# Altium PCB LAN9512_pcb.PcbDoc (part 2 of 2)
Units mm, origin at the board's own origin, x right, y up, seen from the top; angles counter-clockwise.
Board outline 57.95 x 40.02 mm, 2 copper layers (Top Layer, Bottom Layer), stack 1.671 mm thick; 67 components, 38 nets, 238 pads, 97 vias.
Unrouted connection lines stored in the file: 1.
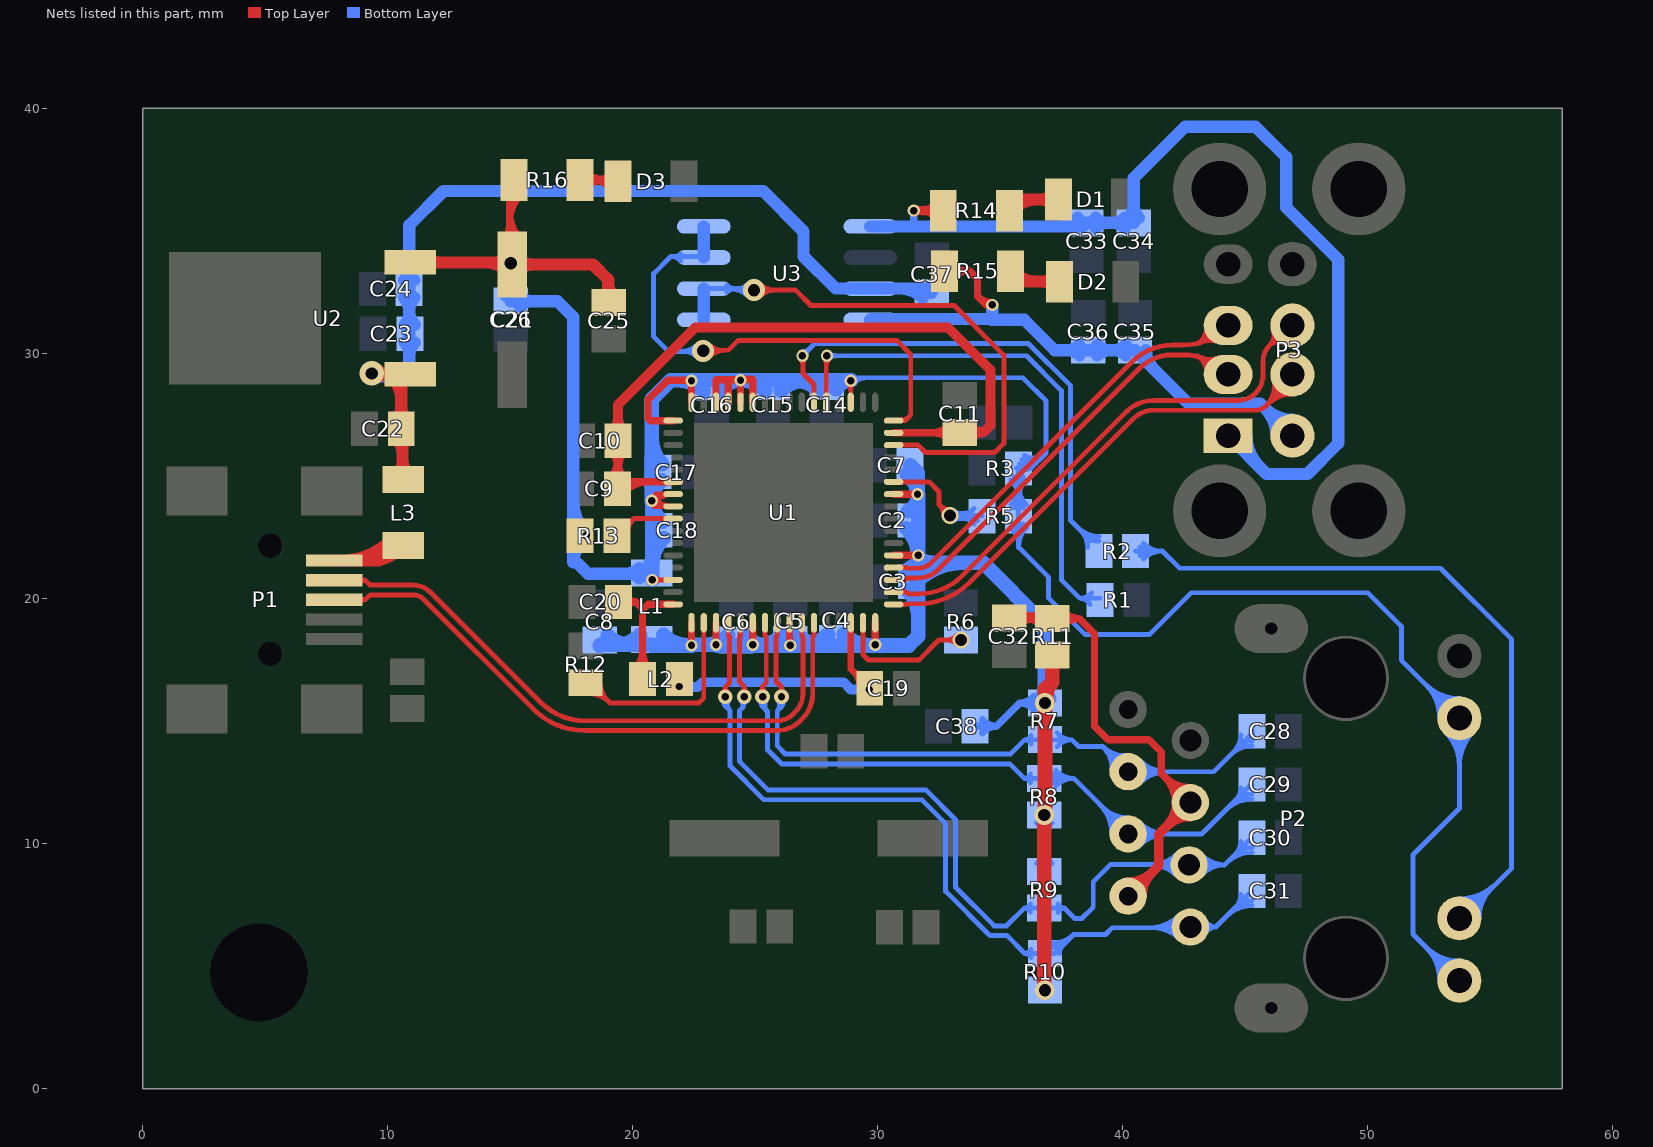
[diagram p2: the nets of this part, all layers, seen from the top]

## Via types
v1: diameter 0.6, hole 0.4, Top Layer to Bottom Layer, 49 vias
v2: diameter 0.5, hole 0.3, Top Layer to Bottom Layer, 16 vias
v3: diameter 1, hole 0.5, Top Layer to Bottom Layer, 12 vias
v4: diameter 0.6, hole 0.3, Top Layer to Bottom Layer, 5 vias
v5: diameter 0.9, hole 0.5, Top Layer to Bottom Layer, 4 vias
v6: diameter 0.8, hole 0.5, Top Layer to Bottom Layer, 3 vias
v7: diameter 0.7, hole 0.5, Top Layer to Bottom Layer, 3 vias
v8: diameter 1.27, hole 0.711, Top Layer to Bottom Layer, 2 vias
v9: diameter 0.7, hole 0.3, Top Layer to Bottom Layer, 2 vias
v10: diameter 0.8, hole 0.3, Top Layer to Bottom Layer, 1 vias

## Nets (pads, with @x,y where several pads share a name; then routed paths per layer and width w, separated by ;. In a path a pad name is that pad's centre, name@x,y a point inside that pad or via, vN(x,y) a via of type N, cw(c..) or ccw(c..) an arc to the next point about the centre after c; other vN are vias at no path point) (continued)
NetC32_2: C32.2 P2.2 P2.5 R11.1 | length 31
  Top Layer w0.3: C32.2@35.375,19.225 37.1,19.225 R11.1@37.125,19.2 38.225,19.2 ; C32.2@35.808,18.942 cw(c36.491,18.259) 36.491,19.225 cw(c36.491,20.191) C32.2@35.808,19.508 ; C32.2@35.949,19.225 cw(c35.949,18.174) R11.1@36.692,18.917 ; C32.2@36.07,19.225 ccw(c36.07,20.105) R11.1@36.692,19.483 ; 36.177,19.309 ccw(c36.303,19.78) R11.1@36.672,19.461 ; 36.252,19.289 cw(c36.092,18.69) R11.1@36.629,19 ; 36.258,19.163 cw(c36.342,18.85) R11.1@36.625,19.007 ; 36.352,19.188 ccw(c36.234,19.628) R11.1@36.629,19.4 ; R11.1@37.561,18.92 cw(c38.225,18.272) 38.225,19.2 ; R11.1@37.561,19.48 ccw(c38.225,20.128) 38.225,19.2 ; P2.5@42.152,11.683 ccw(c40.674,11.683) 41.719,12.728 ccw(c42.764,13.772) P2.5@42.764,12.295 ; P2.5@42.764,11.683 41.575,12.872 41.575,13.75 41.075,14.25 39.4,14.25 38.85,14.8 38.85,18.575 38.225,19.2
  Top Layer w0.4: P2.2@40.224,7.863 41.475,9.114 41.475,10.394 P2.5@42.764,11.683 ; P2.2@40.224,8.425 ccw(c40.224,9.782) 41.183,8.822 ccw(c42.143,7.863) P2.2@40.786,7.863 ; P2.5@42.202,11.683 cw(c40.845,11.683) 41.805,10.724 cw(c42.764,9.764) P2.5@42.764,11.121
NetD1_1: D1.1 R14.1 | length 4.3
  Top Layer w0.5: R14.1@35.375,35.85 35.825,36.3 D1.1@37.375,36.3 ; R14.1@35.587,35.938 cw(c36.461,35.064) 36.461,36.3 ; D1.1@37.163,36.088 ccw(c36.651,35.576) 36.651,36.3 ccw(c36.651,37.024) D1.1@37.163,36.512
NetD2_1: D2.1 R15.1 | length 4.7
  Top Layer w0.5: R15.1@35.425,33.625 R15.1@35.425,33.375 35.425,33 35.475,32.95 D2.1@37.425,32.95 ; R15.1@35.637,33.287 ccw(c36.451,34.101) 36.451,32.95 ; D2.1@37.213,32.738 ccw(c36.701,32.226) 36.701,32.95 ccw(c36.701,33.674) D2.1@37.213,33.162
NetD3_1: D3.1 R16.1 | length 5.1
  Top Layer w0.3: R16.1@17.725,37.125 D3.1@19.35,37.125 ; R16.1@18.133,36.817 cw(c18.876,36.074) D3.1@18.876,37.125 ; R16.1@18.133,37.383 ccw(c18.755,38.005) 18.755,37.125 ; R16.1@18.253,37.125 cw(c18.253,35.903) D3.1@19.117,36.767 ; 18.615,37.125 ccw(c18.615,37.835) D3.1@19.117,37.333 ; 18.699,37.077 cw(c18.769,36.813) D3.1@19.026,36.909
NetL3_2: L3.2 P1.1 | length 7.4
  Top Layer w0.5: P1.1@7.812,21.562 9.637,21.562 L3.2@10.3,22.225 ; P1.1@8.121,21.562 ccw(c8.121,24.379) L3.2@10.113,22.387 ; 9.328,21.562 ccw(c9.328,23.172) L3.2@10.466,22.034 ; 9.685,21.61 cw(c10.325,20.97) L3.2@10.325,21.875 ; L3.2@9.866,21.791 ccw(c9.482,22.175) L3.2@10.025,22.175
NetR1_2: R1.2 U1.21 | length 23.9
  Top Layer w0.2: v2@27.819,29.819 cw(c27.623,29.623) 27.9,29.623 ; U1.21@27.9,28.025 27.9,28.95 v2@27.9,29.975 ; 27.9,29.503 cw(c28.347,29.503) v2@28.031,29.819
  Bottom Layer w0.2: v2(27.925,29.925) 36.075,29.925 37.5,28.5 37.5,20.775 38.25,20.025 ; v2@28.031,29.819 cw(c28.287,29.563) 28.287,29.925 cw(c28.287,30.287) v2@28.031,30.031 ; R1.2@38.667,19.759 ccw(c38.25,19.564) 38.25,20.025 ; R1.2@38.736,20.246 cw(c38.25,20.67) 38.25,20.025 ; R1.2@39.075,20.025 38.25,20.025
NetR2_2: R2.2 U1.22 | length 24
  Top Layer w0.2: v2@26.819,29.819 cw(c26.503,29.503) 26.95,29.503 ; v2@26.912,29.913 26.95,29.875 26.95,29.2 27.4,28.75 U1.22@27.4,28.025 ; 26.95,29.623 cw(c27.227,29.623) v2@27.031,29.819
  Bottom Layer w0.2: v2(26.925,29.925) 27.425,30.425 36.15,30.425 37.875,28.7 37.875,23.2 R2.2@38.7,22.375 ; v2@26.925,30.075 ccw(c26.925,30.437) 27.181,30.181 ccw(c27.437,29.925) v2@27.075,29.925 ; 38.171,22.904 ccw(c39.025,23.757) R2.2@39.025,22.55 ; 38.292,22.783 cw(c37.609,22.1) R2.2@38.575,22.1 ; R2.2@38.513,22.562 ccw(c39.025,23.074) R2.2@39.025,22.35
NetR5_2: R5.2 U1.11 | length 10.2
  Top Layer w0.2: U1.11@30.65,24.775 32.1,24.775 32.5,24.375 32.5,23.85 32.725,23.625 v7@32.825,23.625 ; v7@32.7,23.4 ccw(c32.096,23.4) 32.523,23.827 ccw(c32.95,24.254) v7@32.95,23.65
  Bottom Layer w0.2: v7(32.95,23.4) 34.225,23.4 R5.2@34.25,23.375 ; v7@33.078,23.185 cw(c33.44,22.578) 33.623,23.261 ; v7@33.1,23.6 ccw(c33.453,24.071) 33.606,23.502 ; v7@33.103,23.4 cw(c33.103,22.228) R5.2@33.932,23.057 ; v7@33.127,23.223 cw(c33.554,22.796) 33.554,23.4 cw(c33.554,24.004) v7@33.127,23.577 ; v7@33.167,23.275 cw(c33.48,23.094) 33.386,23.443 ; v7@33.167,23.525 ccw(c33.572,23.759) 33.451,23.307 ; v7@33.224,23.4 ccw(c33.224,24.401) R5.2@33.932,23.693 ; 33.586,23.4 cw(c33.586,22.711) R5.2@34.073,23.198
NetR6_2: R6.2 U1.63 | length 6.7
  Top Layer w0.2: U1.63@29.4,19.025 29.4,17.725 29.625,17.5 31.675,17.5 32.5,18.325 v7(33.4,18.325) ; v7@33.223,18.148 ccw(c32.796,17.721) 32.796,18.325 ccw(c32.796,18.929) v7@33.223,18.502
NetR12_2: R12.2 U1.50 | length 11
  Top Layer w0.2: R12.2@18.075,16.575 18.25,16.575 19.075,15.75 22.7,15.75 22.9,15.95 U1.50@22.9,19.025 ; R12.2@18.225,16.125 cw(c18.225,14.978) 19.036,15.789 ; R12.2@18.225,16.325 cw(c18.225,15.661) R12.2@18.694,16.131 ; R12.2@18.475,16.575 ccw(c19.018,16.575) R12.2@18.634,16.191 ; R12.2@18.675,16.575 ccw(c19.701,16.575) 18.976,15.849
NetR13_2: R13.2 U1.41 | length 4.2
  Top Layer w0.2: R13.2@19.35,22.575 20.05,23.275 ; R13.2@19.433,22.961 ccw(c19.558,23.317) R13.2@19.825,23.05 ; R13.2@19.499,23.15 ccw(c19.675,23.65) 20.05,23.275 ; R13.2@19.8,22.725 cw(c20.524,22.725) 20.012,23.237 ; U1.41@21.65,23.275 20.05,23.275
PORTA: U1.14 U3.1 U3.2 | length 27
  Top Layer w0.2: v5(24.95,32.6) 26.65,32.6 27.275,31.975 33.125,31.975 35.15,29.95 35.15,26.35 34.775,25.975 31.95,25.975 31.65,26.275 U1.14@30.65,26.275 ; v5@25.197,32.353 cw(c25.795,31.755) 25.795,32.6 cw(c25.795,33.445) v5@25.197,32.847
  Bottom Layer w0.2: U3.2@22.9,32.625 U3.2@22.975,32.625 ; U3.2@22.9,32.665 v5@25.025,32.665 ; U3.2@23.841,32.524 cw(c24.183,32.182) 24.183,32.665 cw(c24.183,33.148) U3.2@23.841,32.806 ; U3.2@23.948,32.665 cw(c23.948,31.598) v5@24.703,32.353 ; 24.262,32.665 ccw(c24.262,33.288) v5@24.703,32.847 ; 24.431,32.665 cw(c24.431,32.081) v5@24.844,32.494
  Bottom Layer w0.5: U3.1@22.9,31.395 22.9,32.625 U3.2@22.9,32.665
PORTB: U1.16 U3.3 U3.4 | length 24.4
  Top Layer w0.2: v5@22.9,30.15 23.9,30.15 24.3,30.55 30.775,30.55 31.35,29.975 31.35,27.5 31.125,27.275 U1.16@30.65,27.275 ; v5@23.122,29.878 cw(c23.78,29.22) 23.78,30.15 ; v5@23.122,30.372 ccw(c23.66,30.91) 23.66,30.15 ; U1.16@30.925,27.3 ccw(c30.925,27.843) 31.309,27.459
  Bottom Layer w0.2: 21.714,33.975 ccw(c21.714,34.321) U3.3@21.959,34.076 ; U3.3@21.953,33.799 ccw(c21.55,33.425) 21.55,33.975 ; 21.97,30.1 ccw(c21.97,31.03) v5@22.628,30.372 ; 22.09,30.1 cw(c22.09,29.34) v5@22.628,29.878 ; v5@22.9,30.1 21.45,30.1 20.85,30.7 20.85,33.275 21.55,33.975 ; U3.3@22.9,33.975 21.55,33.975
  Bottom Layer w0.5: U3.3@22.9,33.935 22.9,33.975 U3.4@22.9,35.205
  other v5: 22.875,30.125
PWRA: C35.2 C36.2 P3.5 R15.2 U3.8 | length 31.6
  Top Layer w0.3: R15.2@32.725,33.375 33.75,33.375 34.075,33.05 34.075,32.35 34.425,32 v2(34.675,32) ; R15.2@33.008,33.092 cw(c33.691,32.409) 33.691,33.375 cw(c33.691,34.341) R15.2@33.008,33.658 ; 34.078,32.347 ccw(c34.675,32.945) v2@34.675,32.1
  Bottom Layer w0.5: U3.8@29.7,31.395 29.725,31.42 34.675,31.42 v2(34.675,32) ; 34.65,31.395 35.98,31.395 37.225,30.15 C36.2@38.6,30.15 C35.2@40.5,30.15 42.675,27.975 45.615,27.975 P3.5@46.928,26.662 ; C36.2@38.238,29.938 ccw(c37.726,29.426) 37.726,30.15 ccw(c37.726,30.874) C36.2@38.238,30.362 ; C36.2@38.962,29.938 cw(c39.474,29.426) 39.474,30.15 cw(c39.474,30.874) C36.2@38.962,30.362 ; C35.2@40.138,29.938 ccw(c39.626,29.426) 39.626,30.15 ccw(c39.626,30.874) C35.2@40.138,30.362 ; C35.2@40.95,30.15 ccw(c42.036,30.15) 41.268,29.382 ; P3.5@46.278,26.662 ccw(c44.709,26.662) 45.818,27.772 ccw(c46.928,28.881) P3.5@46.928,27.312
PWRB: C33.2 C34.2 P3.1 R14.2 U3.5 | length 48.3
  Top Layer w0.3: v2(31.475,35.85) R14.2@32.675,35.85 ; v2@31.525,35.763 cw(c31.749,35.375) 31.865,35.808 ; v2@31.525,35.937 ccw(c31.749,36.325) 31.865,35.892 ; R14.2@32.392,35.567 ccw(c31.709,34.884) 31.709,35.85 ccw(c31.709,36.816) R14.2@32.392,36.133
  Bottom Layer w0.3: 31.475,35.205 v2(31.475,35.85)
  Bottom Layer w0.5: U3.5@29.7,35.205 31.475,35.205 38.38,35.205 C33.2@38.525,35.35 C34.2@40.45,35.35 40.45,37.175 42.55,39.275 45.425,39.275 46.675,38.025 46.675,35.975 48.8,33.85 48.8,26.35 47.55,25.1 45.87,25.1 P3.1@44.308,26.662 ; 37.301,35.205 ccw(c37.301,36.424) C33.2@38.163,35.562 ; C33.2@38.887,35.138 cw(c39.399,34.626) 39.399,35.35 cw(c39.399,36.074) C33.2@38.887,35.562 ; C34.2@40.088,35.138 ccw(c39.576,34.626) 39.576,35.35 ccw(c39.576,36.074) C34.2@40.088,35.562 ; C34.2@40.238,35.562 ccw(c39.726,36.074) 40.45,36.074 ccw(c41.174,36.074) C34.2@40.662,35.562 ; P3.1@45.058,26.662 ccw(c46.869,26.662) 45.588,25.382
RX_N: C28.2 P2.6 R7.1 U1.56 | length 40.6
  Top Layer w0.2: U1.56@25.9,19.025 25.9,18.503 25.85,18.453 25.85,16.625 26.075,16.4 ; v4@25.955,16.16 ccw(c25.775,16.4) 26.075,16.4 ; v4(26.075,16) 26.075,16.4 ; v4@26.195,16.16 cw(c26.375,16.4) 26.075,16.4
  Bottom Layer w0.2: v4@25.921,15.872 cw(c25.665,15.66) 25.9,15.425 ; v4@25.955,15.84 cw(c25.775,15.6) 26.075,15.6 ; 26.055,15.58 ccw(c25.835,15.801) v4(26.075,16) 26.075,15.6 ; v4@26.195,15.84 ccw(c26.375,15.6) 26.075,15.6 ; R7.1@36.258,14.08 ccw(c36.005,13.977) 36.005,14.25 ; R7.1@36.258,14.42 cw(c36.005,14.523) 36.005,14.25 ; R7.1@37.323,13.965 cw(c37.925,13.472) 37.925,14.25 ; R7.1@37.323,14.535 ccw(c37.925,15.028) 37.925,14.25 ; P2.6@39.563,12.987 ccw(c38.289,13.072) 39.192,13.975 ; P2.6@39.763,12.974 ccw(c38.873,13.033) 39.504,13.663 ccw(c40.134,14.294) P2.6@40.193,13.404 ; P2.6@40.18,13.604 cw(c40.095,14.878) 39.192,13.975 ; P2.6@40.551,12.616 cw(c41.339,11.828) 41.339,12.943 cw(c41.339,14.058) P2.6@40.551,13.27 ; P2.6@40.692,12.475 cw(c41.822,11.345) 41.822,12.943 cw(c41.822,14.541) P2.6@40.692,13.411 ; 44.421,13.646 cw(c45.275,12.793) C28.2@45.275,14 ; 44.542,13.767 ccw(c43.859,14.45) C28.2@44.825,14.45 ; C28.2@44.763,13.988 cw(c45.275,13.476) C28.2@45.275,14.2 ; C28.2@45.275,14.6 45.275,14.5 43.718,12.943 P2.6@40.224,12.943 39.192,13.975 ; 25.9,15.425 25.9,14 26.238,13.662 35.418,13.662 36.005,14.25 ; 25.9,15.425 26.075,15.6 ; 36.005,14.25 R7.1@36.825,14.25 37.925,14.25 ; 37.925,14.25 38.2,13.975 39.192,13.975
RX_P: C29.2 P2.4 R8.1 U1.55 | length 43.9
  Top Layer w0.2: v4@25.173,16.154 ccw(c24.948,16.425) 25.3,16.425 ; v4(25.3,16) 25.3,16.425 ; U1.55@25.4,19.025 25.4,18.503 25.45,18.453 25.45,16.575 25.3,16.425 ; v4@25.427,16.154 cw(c25.652,16.425) 25.3,16.425
  Bottom Layer w0.2: v4@25.18,15.84 cw(c25,15.6) 25.3,15.6 ; 25.334,15.566 cw(c25.572,15.803) v4(25.3,16) 25.3,15.6 ; v4@25.42,15.84 ccw(c25.6,15.6) 25.3,15.6 ; v4@25.462,15.883 ccw(c25.764,15.664) 25.5,15.4 ; R8.1@36.233,12.505 ccw(c35.98,12.402) 35.98,12.675 ; R8.1@36.233,12.845 cw(c35.98,12.948) 35.98,12.675 ; R8.1@37.131,12.503 cw(c37.533,12.12) 37.533,12.675 cw(c37.533,13.23) R8.1@37.131,12.847 ; R8.1@37.276,12.365 cw(c38,11.675) 38,12.675 ; R8.1@37.276,12.985 ccw(c38,13.675) 38,12.675 ; 39.06,11.615 cw(c37.848,10.403) P2.4@39.562,10.403 ; 39.176,11.499 ccw(c40.224,12.547) P2.4@40.224,11.065 ; 39.401,11.274 cw(c38.531,10.403) P2.4@39.762,10.403 ; 39.517,11.158 ccw(c40.224,11.864) P2.4@40.224,10.865 ; P2.4@40.551,10.076 cw(c41.339,9.288) 41.339,10.403 cw(c41.339,11.518) P2.4@40.551,10.73 ; P2.4@40.692,9.935 cw(c41.822,8.805) 41.822,10.403 cw(c41.822,12.001) P2.4@40.692,10.871 ; 44.208,11.383 cw(c45.275,10.316) C29.2@45.275,11.825 ; 44.549,11.724 cw(c45.275,10.999) C29.2@45.275,12.025 ; 44.631,11.806 ccw(c44.161,12.275) C29.2@44.825,12.275 ; C29.2@45.275,12.425 45.25,12.425 43.228,10.403 P2.4@40.224,10.403 40.224,10.626 40.049,10.626 38,12.675 ; 25.3,15.6 25.5,15.4 ; 25.5,15.4 25.5,13.834 26.072,13.263 35.393,13.263 35.98,12.675 ; 35.98,12.675 R8.1@36.8,12.675 38,12.675
SPD: P2.10 R2.1 | length 38.1
  Bottom Layer w0.2: R2.1@40.525,21.95 41.625,21.95 42.325,21.25 52.975,21.25 55.875,18.35 55.875,9 P2.10@53.775,6.9 ; R2.1@40.702,21.773 cw(c41.129,21.346) 41.129,21.95 cw(c41.129,22.554) R2.1@40.702,22.127 ; R2.1@40.843,21.632 cw(c41.611,20.864) 41.611,21.95 cw(c41.611,23.036) R2.1@40.843,22.268 ; P2.10@53.744,7.358 ccw(c53.744,8.539) 54.579,7.704 ; P2.10@53.744,7.558 ccw(c53.744,9.221) 54.92,8.045 ; P2.10@53.744,7.758 ccw(c53.744,9.904) 55.262,8.387 ; P2.10@54.344,6.958 cw(c55.578,6.958) 54.705,7.83 ; P2.10@54.544,6.958 cw(c56.26,6.958) 55.047,8.172
TX_N: C30.2 P2.3 R9.1 U1.53 | length 46.9
  Top Layer w0.2: U1.53@24.4,19.025 24.4,18.503 24.35,18.453 24.35,16.625 24.55,16.425 ; v4@24.423,16.154 ccw(c24.198,16.425) 24.55,16.425 ; v4(24.55,16) 24.55,16.425 ; v4@24.677,16.154 cw(c24.902,16.425) 24.55,16.425 ; P2.3@42.71,8.785 P2.3@42.71,9.143
  Bottom Layer w0.2: v4@24.409,15.859 cw(c24.188,15.638) 24.5,15.638 ; 24.5,15.572 cw(c24.791,15.572) v4@24.648,15.826 ; v4(24.55,16) 24.5,15.95 24.5,15.575 24.35,15.425 24.35,13.366 25.516,12.2 31.966,12.2 33.175,10.991 33.175,8.225 34.75,6.65 35.255,6.65 35.98,7.375 ; R9.1@36.233,7.205 ccw(c35.98,7.102) 35.98,7.375 ; R9.1@36.233,7.545 cw(c35.98,7.648) 35.98,7.375 ; R9.1@37.365,7.202 cw(c37.625,7.094) 37.625,7.375 ; R9.1@37.365,7.548 ccw(c37.625,7.656) 37.625,7.375 ; 41.095,9.15 cw(c41.095,7.528) P2.3@42.242,8.675 ; 41.129,9.15 ccw(c41.129,10.724) P2.3@42.242,9.611 ; 41.578,9.15 cw(c41.578,8.011) P2.3@42.383,8.816 ; 41.612,9.15 ccw(c41.612,10.241) P2.3@42.383,9.47 ; P2.3@43.058,8.839 cw(c43.727,8.254) 43.727,9.143 cw(c43.727,10.032) P2.3@43.058,9.447 ; P2.3@43.208,8.707 cw(c44.168,7.869) 44.168,9.143 ; P2.3@43.208,9.579 ccw(c44.168,10.417) 44.168,9.143 ; 44.251,9.226 cw(c45.275,8.201) C30.2@45.275,9.65 ; 44.592,9.567 cw(c45.275,8.884) C30.2@45.275,9.85 ; 44.613,9.588 ccw(c44.101,10.1) C30.2@44.825,10.1 ; C30.2@45.275,10.25 44.168,9.143 ; 35.98,7.375 R9.1@36.8,7.375 37.625,7.375 ; 37.625,7.375 38.05,6.95 38.334,6.95 38.8,7.416 38.8,8.45 39.5,9.15 42.703,9.15 P2.3@42.71,9.143 44.168,9.143
TX_P: C31.2 P2.1 R10.1 U1.52 | length 46
  Top Layer w0.2: v4@23.655,16.16 ccw(c23.475,16.4) 23.775,16.4 ; v4(23.775,16) 23.775,16.4 ; v4@23.895,16.16 cw(c24.075,16.4) 23.775,16.4 ; U1.52@23.9,19.025 23.9,18.503 23.95,18.453 23.95,16.575 23.775,16.4 ; P2.1@42.764,6.603 P2.1@42.764,6.711
  Bottom Layer w0.2: v4@23.664,15.834 cw(c23.523,15.625) 23.775,15.625 ; 23.808,15.592 cw(c24.032,15.815) v4(23.775,16) 23.775,15.625 ; v4@23.886,15.834 ccw(c24.027,15.625) 23.775,15.625 ; v4@23.938,15.883 ccw(c24.226,15.676) 23.975,15.425 ; R10.1@36.258,5.355 ccw(c36.005,5.252) 36.005,5.525 ; R10.1@36.258,5.695 cw(c36.005,5.798) 36.005,5.525 ; R10.1@37.007,5.773 ccw(c37.117,6.609) 37.713,6.013 ; R10.1@37.033,5.971 ccw(c37.183,7.117) 38,6.3 ; R10.1@37.425,5.525 cw(c37.908,5.525) 37.566,5.866 ; 41.098,6.575 ccw(c41.098,8.269) P2.1@42.296,7.071 ; 41.233,6.575 cw(c41.233,5.072) P2.1@42.296,6.135 ; 41.581,6.575 ccw(c41.581,7.786) P2.1@42.437,6.93 ; 41.716,6.575 cw(c41.716,5.555) P2.1@42.437,6.276 ; P2.1@43.364,6.323 cw(c43.803,6.119) 43.803,6.603 ; P2.1@43.364,6.883 ccw(c43.803,7.087) 43.803,6.603 ; 44.251,7.051 cw(c45.275,6.026) C31.2@45.275,7.475 ; 44.592,7.392 cw(c45.275,6.709) C31.2@45.275,7.675 ; 44.613,7.413 ccw(c44.101,7.925) C31.2@44.825,7.925 ; C31.2@45.275,8.075 43.803,6.603 ; 23.775,15.625 23.975,15.425 ; 23.975,15.425 23.975,13.175 25.35,11.8 31.8,11.8 32.775,10.825 32.775,8.059 34.584,6.25 35.28,6.25 36.005,5.525 ; 36.005,5.525 R10.1@36.825,5.525 37.225,5.525 38,6.3 ; 38,6.3 39.3,6.3 39.575,6.575 42.736,6.575 P2.1@42.764,6.603 43.803,6.603
USB0_N: P1.2 U1.58 | length 25.5
  Top Layer w0.2: P1.2@7.812,20.762 9.079,20.762 9.279,20.562 11.025,20.562 cw(c11.025,19.527) 11.757,20.259 16.247,15.769 ccw(c18.043,17.565) 18.043,15.025 25.886,15.025 ccw(c25.886,15.964) 26.55,15.3 26.635,15.385 ccw(c25.874,16.146) 26.95,16.146 26.95,18.453 26.9,18.503 U1.58@26.9,19.025 ; P1.2@8.818,20.656 cw(c9.074,20.4) 9.074,20.762 cw(c9.074,21.124) P1.2@8.818,20.868
USB0_P: P1.3 U1.59 | length 26.1
  Top Layer w0.2: P1.3@7.812,19.962 9.079,19.962 9.279,20.162 11.025,20.162 cw(c11.025,19.527) 11.474,19.976 15.964,15.486 ccw(c18.043,17.565) 18.043,14.625 25.886,14.625 ccw(c25.886,15.964) 26.833,15.017 26.918,15.102 ccw(c25.874,16.146) 27.35,16.146 27.35,18.453 27.4,18.503 U1.59@27.4,19.025 ; P1.3@8.818,19.856 cw(c9.074,19.6) 9.074,19.962 cw(c9.074,20.324) P1.3@8.818,20.068
USB2_N: P3.6 U1.1 | length 24.7
  Top Layer w0.2: U1.1@30.65,19.775 31.12,19.775 ccw(c31.12,19.86) 31.18,19.8 31.657,19.8 ccw(c31.657,22.74) 33.736,20.661 40.425,27.35 cw(c41.27,26.505) 41.27,27.7 45.392,27.7 ccw(c45.392,28.383) 45.875,27.9 ; 45.919,27.944 cw(c46.928,26.935) P3.6@46.928,28.362 ; 46.119,28.144 ccw(c45.491,28.773) P3.6@46.349,29.005 ; P3.6@46.156,28.953 cw(c45.106,28.669) 45.875,27.9 ; 46.261,28.286 cw(c46.928,27.618) P3.6@46.928,28.562 ; 46.364,28.389 ccw(c45.875,28.877) P3.6@46.542,29.058 ; P3.6@46.928,29.162 46.928,28.953 45.875,27.9
USB2_P: P3.7 U1.2 | length 23.2
  Top Layer w0.2: U1.2@30.65,20.275 31.155,20.275 ccw(c31.336,20.456) 31.336,20.2 31.657,20.2 ccw(c31.657,22.74) 33.453,20.944 40.142,27.633 cw(c41.27,26.505) 41.27,28.1 44.725,28.1 ccw(c44.725,29.08) 45.418,28.387 ; 45.418,28.388 ccw(c44.676,29.129) 45.725,29.129 ; 45.725,29 45.725,29.686 cw(c46.664,29.686) 46,30.35 ; P3.7@46.157,30.948 cw(c45.566,30.784) 46,30.35 ; 46.197,30.547 cw(c46.483,30.261) P3.7@46.662,30.624 ; P3.7@46.574,30.445 ccw(c46.353,29.997) 46,30.35 ; P3.7@46.928,31.162 ccw(c46.928,30.882) 46.73,31.08 46,30.35
USB3_N: P3.2 U1.3 | length 20.5
  Top Layer w0.2: U1.3@30.65,20.775 31.049,20.775 ccw(c31.049,21.031) 31.23,20.85 31.65,20.85 ccw(c31.65,21.997) 32.461,21.186 40.68,29.405 cw(c42.025,28.06) 42.025,29.962 42.456,29.962 cw(c42.456,27.422) 44.252,29.218 P3.2@44.308,29.162 ; U1.3@30.938,20.797 ccw(c31.023,20.944) 31.067,20.78 ; 43.325,29.753 cw(c43.038,29.256) P3.2@43.61,29.206 ; P3.2@43.411,29.223 ccw(c42.693,29.286) 43.053,29.91 ccw(c43.563,30.794) P3.2@43.886,29.826 ; 43.438,29.688 ccw(c43.751,30.231) P3.2@43.95,29.636
USB3_P: P3.3 U1.4 | length 20.4
  Top Layer w0.2: U1.4@30.65,21.275 31.155,21.275 ccw(c31.216,21.335) 31.216,21.25 31.65,21.25 ccw(c31.65,21.997) 32.178,21.469 40.397,29.688 cw(c42.025,28.06) 42.025,30.362 42.456,30.362 ccw(c42.456,32.902) 44.252,31.106 P3.3@44.308,31.162 ; 43.325,30.571 ccw(c43.038,31.068) P3.3@43.61,31.118 ; P3.3@43.411,31.101 cw(c42.693,31.038) 43.053,30.414 cw(c43.563,29.53) P3.3@43.886,30.498 ; 43.438,30.636 cw(c43.751,30.093) P3.3@43.95,30.688
VCC3V3: C14.2 C15.2 C16.2 C17.2 C18.2 C21.2 C25.2 C26.2 L1.1 P2.9 P2.11 R3.2 R5.1 R13.1 R16.2 U1.19 U1.27 U1.28 U1.29 U1.30 U1.32 U1.33 U1.39 U1.40 U1.46 U2.3 | length 179.4
  Top Layer w0.2: C21.2@14.975,33.75 14.99,33.735 v5(15.025,33.7) ; v2@20.736,24.031 cw(c21.238,23.636) 21.238,24.275 ; v2@20.739,23.966 ccw(c21.183,24.389) 21.183,23.775 ; v2@20.775,20.8 v2(20.8,20.775) U1.46@21.65,20.775 ; v2@20.884,24.103 ccw(c21.65,24.833) U1.40@21.65,23.775 20.875,23.775 20.775,23.875 v2(20.775,24) 20.775,24.1 20.95,24.275 ; v2@20.893,23.907 cw(c21.65,23.312) U1.39@21.65,24.275 20.95,24.275 ; v2@20.906,20.669 cw(c21.162,20.413) 21.162,20.775 cw(c21.162,21.137) v2@20.906,20.881 ; v2@20.912,24.062 cw(c21.084,24.141) 20.95,24.275 ; v2@22.375,28.925 v2(22.4,28.9) ; v2@24.375,28.95 v2(24.4,28.925) v2@24.45,28.975 ; 24.875,28.975 24.9,28.95 ; v2@28.794,28.794 cw(c28.538,28.538) 28.9,28.538 cw(c29.262,28.538) v2@29.006,28.794 ; v2@28.825,28.925 28.9,28.85 U1.19@28.9,28.025
  Top Layer w0.3: C21.2@14.757,34.718 ccw(c14.23,35.245) 14.975,35.245 ; C21.2@14.813,33.912 ccw(c14.421,34.304) C21.2@14.975,34.304 ; R16.2@14.867,36.517 cw(c14.607,36.257) R16.2@14.975,36.257 ; C21.2@14.975,33.75 R16.2@14.975,37.075 ; C21.2@14.975,34.545 ccw(c15.87,34.545) C21.2@15.237,33.912 ; 14.975,35.004 ccw(c15.679,35.004) C21.2@15.181,34.506 ; 14.975,35.412 cw(c16.538,35.412) R16.2@15.433,36.517 ; 14.975,35.728 ccw(c16.403,35.728) C21.2@15.393,34.718 ; 14.975,36.136 cw(c15.814,36.136) R16.2@15.221,36.729 ; U1.33@21.65,27.275 20.725,27.275 20.625,27.375 20.625,28.125 21.425,28.925 v2@22.375,28.925 ; 22.098,28.925 cw(c22.098,28.598) v2@22.329,28.829 ; U1.32@22.4,28.025 v2(22.4,28.9) ; U1.30@23.4,28.025 23.4,28.95 23.9,28.95 ; U1.29@23.9,28.025 23.9,28.95 ; 24.098,28.95 cw(c24.098,28.623) v2@24.329,28.854 ; v2@24.375,28.95 23.9,28.95 ; U1.28@24.4,28.025 v2(24.4,28.925) ; v2@24.45,28.975 24.875,28.975 ; v2@24.471,28.854 cw(c24.762,28.563) 24.762,28.975 ; U1.27@24.9,28.025 24.9,28.95
  Top Layer w0.5: U2.3@10.925,33.735 C21.2@14.99,33.735 ; U2.3@11.652,33.558 cw(c12.079,33.131) 12.079,33.735 cw(c12.079,34.339) U2.3@11.652,33.912 ; 14.025,33.735 cw(c14.025,32.6) C21.2@14.828,33.403 ; 14.435,33.735 ccw(c14.435,34.29) C21.2@14.828,33.897 ; 14.458,33.735 cw(c14.458,33.133) C21.2@14.884,33.559 ; v5(15.025,33.7) C21.2@15.075,33.65 18.375,33.65 19,33.025 C25.2@19,32.075 ; C21.2@15.166,33.841 ccw(c15.629,34.304) C21.2@15.629,33.65 ; C21.2@15.322,33.403 cw(c15.92,32.805) 15.92,33.65 cw(c15.92,34.495) C21.2@15.322,33.897 ; C25.2@18.813,32.312 ccw(c18.361,32.764) 19,32.764 ; 19,32.885 ccw(c19.81,32.885) C25.2@19.237,32.312
  Bottom Layer w0.2: v2(28.9,28.9) 28.925,28.925 29.025,29.025 35.925,29.025 36.875,28.075 36.875,25.95 ; v2@29.006,28.794 cw(c29.564,28.236) 29.564,29.025 ; R5.1@35.432,22.907 cw(c34.664,22.139) 35.75,22.139 cw(c36.836,22.139) R5.1@36.068,22.907 ; R5.1@35.432,23.843 ccw(c34.664,24.611) 35.75,24.611 ccw(c36.836,24.611) R5.1@36.068,23.843 ; R3.2@35.432,24.857 cw(c34.664,24.089) 35.75,24.089 cw(c36.836,24.089) R3.2@36.068,24.857 ; R5.1@35.573,23.048 cw(c35.146,22.621) 35.75,22.621 cw(c36.354,22.621) R5.1@35.927,23.048 ; R5.1@35.573,23.702 ccw(c35.146,24.129) 35.75,24.129 ccw(c36.354,24.129) R5.1@35.927,23.702 ; R3.2@35.573,24.998 cw(c35.146,24.571) 35.75,24.571 cw(c36.354,24.571) R3.2@35.927,24.998 ; R3.2@35.669,25.349 ccw(c35.962,25.807) 36.347,25.422 ; R3.2@35.777,25.517 ccw(c36.1,26.022) 36.523,25.598 ; R3.2@35.885,25.686 ccw(c36.237,26.236) 36.699,25.774 ; R3.2@35.992,25.854 ccw(c36.374,26.451) 36.875,25.95 ; P2.9@52.944,4.418 ccw(c51.013,4.418) 52.378,5.784 ccw(c53.744,7.149) P2.9@53.744,5.218 ; P2.11@52.944,15.128 ccw(c51.013,15.128) 52.378,16.494 ccw(c53.744,17.859) P2.11@53.744,15.928 ; P2.9@53.144,4.418 ccw(c51.695,4.418) 52.72,5.442 ccw(c53.744,6.467) P2.9@53.744,5.018 ; P2.11@53.144,15.128 ccw(c51.695,15.128) 52.72,16.152 ccw(c53.744,17.177) P2.11@53.744,15.728 ; P2.11@53.178,14.562 cw(c51.813,13.197) 53.744,13.197 cw(c55.675,13.197) P2.11@54.31,14.562 ; P2.11@53.32,14.704 cw(c52.295,13.679) 53.744,13.679 cw(c55.193,13.679) P2.11@54.168,14.704 ; P2.9@53.344,4.418 ccw(c52.378,4.418) 53.061,5.101 ccw(c53.744,5.784) P2.9@53.744,4.818 ; P2.11@53.344,15.128 ccw(c52.378,15.128) 53.061,15.811 ccw(c53.744,16.494) P2.11@53.744,15.528 ; P2.11@53.461,14.845 cw(c52.778,14.162) 53.744,14.162 cw(c54.71,14.162) P2.11@54.027,14.845 ; P2.9@53.744,4.418 51.85,6.312 51.85,9.55 53.744,11.444 P2.11@53.744,15.128 51.375,17.497 51.375,18.875 50,20.25 42.8,20.25 41.1,18.55 38.45,18.55 36.975,20.025 36.975,20.875 35.75,22.1 R5.1@35.75,23.375 R3.2@35.75,25.325 36.25,25.325 36.875,25.95
  Bottom Layer w0.5: C26.2@14.813,32.362 ccw(c14.301,32.874) 15.025,32.874 ccw(c15.749,32.874) C26.2@15.237,32.362 ; v5@14.884,33.559 cw(c14.542,33.217) 15.025,33.217 cw(c15.508,33.217) v5@15.166,33.559 ; v5(15.025,33.7) C26.2@15.025,32.15 16.925,32.15 17.575,31.5 17.575,22.575 ; C26.2@15.387,31.938 cw(c15.899,31.426) 15.899,32.15 cw(c15.899,32.874) C26.2@15.387,32.362 ; 17.575,21.493 cw(c18.879,21.493) v4@18.129,22.559 ; 17.575,23.988 ccw(c19.488,23.988) v4@18.135,22.635 ; v4(18.1,22.6) 17.6,22.6 17.575,22.575 ; 19.69,21.025 ccw(c19.69,21.835) L1.1@20.263,21.262 ; 19.811,21.025 cw(c19.811,20.386) L1.1@20.263,20.838 ; L1.1@20.196,21.025 cw(c20.196,20.171) v2(20.8,20.775) 20.775,20.8 20.55,21.025 18.175,21.025 17.575,21.625 17.575,22.575
  Bottom Layer w0.6: L1.1@20.598,21.227 ccw(c20.111,21.714) 20.8,21.714 ; L1.1@20.775,20.8 L1.1@20.775,20.825 ; v2@20.775,23.97 cw(c21.888,23.97) C17.2@21.183,24.831 ; 20.775,26.532 ccw(c22.232,26.532) C17.2@21.202,25.502 ; v2(20.8,20.775) v2@20.8,23.975 ; L1.1@20.8,21.383 cw(c22.342,21.383) C18.2@21.252,22.473 ; C18.2@21.221,23.153 cw(c21.813,23.975) v2@20.8,23.975 ; 21.808,28.925 cw(c21.808,27.383) C16.2@22.898,28.473 ; C16.2@23.578,28.504 cw(c24.4,27.912) v2(24.4,28.925) ; v2(24.4,28.925) cw(c24.4,27.545) C15.2@25.395,28.502 ; C15.2@26.052,28.498 cw(c27.082,27.468) 27.082,28.925 ; 26.568,28.925 cw(c26.568,27.468) C14.2@27.598,28.498 ; C14.2@28.294,28.554 cw(c28.925,28.203) 28.925,28.925 v2(24.4,28.925) ; v2@20.8,23.975 v2(20.775,24) 20.775,28.15 21.55,28.925 v2(24.4,28.925)
VCC18CORE: C9.2 C10.2 C11.2 U1.15 U1.38 | length 38.1
  Top Layer w0.2: C9.2@19.375,24.5 19.4,24.525 C9.2@19.65,24.775 ; C11.2@33.075,26.775 C11.2@33.1,26.8
  Top Layer w0.3: C9.2@19.446,24.579 cw(c19.918,24.107) C9.2@19.918,24.775 ; C9.2@19.65,24.775 U1.38@21.65,24.775 ; C9.2@19.658,24.367 cw(c20.642,23.383) 20.642,24.775 ; C9.2@19.658,24.933 ccw(c20.039,25.314) 20.039,24.775 ; U1.15@30.65,26.775 C11.2@33.075,26.775 ; 32.174,26.775 ccw(c32.174,27.826) C11.2@32.917,27.083 ; 32.295,26.775 cw(c32.295,25.895) C11.2@32.917,26.517
  Top Layer w0.35: C9.2@19.11,24.915 ccw(c18.409,25.616) 19.4,25.616 ; C10.2@19.135,26.035 cw(c18.495,25.395) 19.4,25.395 cw(c20.305,25.395) C10.2@19.665,26.035 ; C9.2@19.4,24.525 C10.2@19.4,26.45 ; 19.4,25.495 ccw(c20.22,25.495) C9.2@19.64,24.915
  Top Layer w0.4: C10.2@19.153,26.847 ccw(c18.555,27.445) 19.4,27.445 ccw(c20.245,27.445) C10.2@19.647,26.847 ; C10.2@19.4,26.475 19.4,27.925 21.5,30.025 22.55,31.075 32.875,31.075 34.6,29.35 34.6,27.075 34.325,26.8 ; C11.2@33.35,26.8 34.325,26.8 ; C11.2@33.752,26.557 cw(c34.325,26.003) 34.325,26.8 ; C11.2@33.752,27.043 ccw(c34.325,27.597) 34.325,26.8
VCC18ETH: C20.2 L2.2 U1.48 | length 7.7
  Top Layer w0.3: C20.2@19.425,19.875 20.125,19.875 ; C20.2@19.77,19.672 cw(c20.125,19.463) 20.125,19.875 ; C20.2@19.77,20.078 ccw(c20.125,20.287) 20.125,19.875 ; L2.2@20.117,17.158 ccw(c19.434,17.841) 20.4,17.841 ccw(c21.366,17.841) L2.2@20.683,17.158 ; L2.2@20.4,16.725 20.4,19.55 ; U1.48@21.65,19.775 20.625,19.775 20.4,19.55 ; 20.125,19.875 20.4,19.6 20.4,19.55
VCC18USB: C19.2 L2.1 U1.62 | length 14
  Top Layer w0.25: U1.62@28.9,19.025 28.9,17.125 ; 29.056,16.969 cw(c28.586,16.5) C19.2@29.25,16.5 ; C19.2@29.213,16.812 cw(c28.701,16.3) C19.2@29.425,16.3 ; C19.2@29.394,16.631 ccw(c29.65,16.887) C19.2@29.65,16.525 ; C19.2@29.591,16.917 cw(c29.44,17.665) 28.9,17.125 ; C19.2@29.675,16.35 28.9,17.125
  Bottom Layer w0.4: v9@21.875,16.4 22.65,16.4 22.85,16.6 28.6,16.6 28.9,16.3 v9(29.65,16.3) ; v9@22.006,16.531 ccw(c22.322,16.847) 22.322,16.4 ; v9@29.544,16.194 ccw(c29.288,15.938) 29.288,16.3 ccw(c29.288,16.662) v9@29.544,16.406
  other v9: 21.9,16.425
VCCUSB: C22.2 C23.2 C24.2 C37.2 L3.1 U2.1 U3.7 | length 50.2
  Top Layer w0.5: v3@9.35,29.075 9.45,29.175 10.915,29.175 U2.1@10.925,29.165 ; v3@9.523,29.019 cw(c9.822,28.706) U2.1@9.934,29.125 ; v3@9.527,29.023 cw(c9.893,28.657) U2.1@9.893,29.175 ; v3@9.527,29.377 ccw(c10.014,29.864) U2.1@10.014,29.175 ; v3@9.747,29.175 cw(c9.747,28.537) 10.198,28.988 cw(c9.349,28.139) 10.55,28.139 ; v3@9.796,29.175 ccw(c9.796,29.744) U2.1@10.198,29.342 ; C22.2@10.338,26.588 cw(c9.705,25.955) 10.6,25.955 ; C22.2@10.338,27.312 ccw(c9.826,27.824) 10.55,27.824 ccw(c11.274,27.824) C22.2@10.762,27.312 ; L3.1@10.413,25.087 ccw(c9.961,25.539) 10.6,25.539 ; U2.1@10.55,28.79 C22.2@10.55,26.95 10.6,26.9 L3.1@10.6,24.975 ; 10.6,25.66 ccw(c11.41,25.66) L3.1@10.837,25.087 ; 10.6,26.196 cw(c11.154,26.196) C22.2@10.762,26.588
  Bottom Layer w0.5: v3@9.35,29.075 10.475,29.075 10.875,29.475 C24.2@10.875,32.65 10.875,35.25 12.275,36.65 25.325,36.65 26.975,35 26.975,33.975 28.285,32.665 U3.7@29.7,32.665 32.035,32.665 C37.2@32.2,32.5 ; v3@9.527,29.377 ccw(c10.255,30.105) 10.255,29.075 ; C24.2@10.663,32.288 cw(c10.151,31.776) 10.875,31.776 cw(c11.599,31.776) C24.2@11.087,32.288 ; C24.2@10.663,33.012 ccw(c10.151,33.524) 10.875,33.524 ccw(c11.599,33.524) C24.2@11.087,33.012 ; C23.2@10.688,30.463 cw(c10.236,30.011) 10.875,30.011 ; C23.2@10.688,31.187 ccw(c10.236,31.639) 10.875,31.639 ; 10.875,29.89 cw(c11.685,29.89) C23.2@11.112,30.463 ; 10.875,31.76 ccw(c11.685,31.76) C23.2@11.112,31.187 ; 30.927,32.665 cw(c30.927,31.377) C37.2@31.838,32.288
  other v3: 9.35,29.2
VDD3V3A: C2.2 C3.2 C4.2 C5.2 C6.2 C7.2 C8.2 C38.2 L1.2 R7.2 R8.2 R9.2 R10.2 R11.2 U1.5 U1.10 U1.49 U1.51 U1.54 U1.57 U1.64 | length 89.9
  Top Layer w0.2: v2@26.4,18.125 v2(26.425,18.1)
  Top Layer w0.3: v2(22.4,18.1) U1.49@22.4,19.025 ; v2(23.4,18.125) U1.51@23.4,19.025 ; v2(24.9,18.125) U1.54@24.9,19.025 ; v2@26.4,18.125 U1.57@26.4,19.025 ; 26.4,18.402 ccw(c26.727,18.402) v2@26.496,18.171 ; v2(29.9,18.125) U1.64@29.9,19.025 ; U1.5@30.65,21.775 v2(31.65,21.775) ; U1.10@30.65,24.275 v2(31.625,24.275)
  Top Layer w0.6: v6(36.825,4.025) 36.8,4.05 v6(36.8,11.175) 36.825,11.2 v6(36.825,15.75) 36.825,16.3 37.125,16.6 ; v6@36.921,15.779 cw(c37.705,16.02) 37.125,16.6 ; R11.2@36.948,17.523 cw(c36.521,17.096) 37.125,17.096 cw(c37.729,17.096) R11.2@37.302,17.523 ; R11.2@37.125,17.7 37.125,16.6
  Bottom Layer w0.2: R9.2@36.482,9.193 ccw(c35.714,9.961) 36.8,9.961 ccw(c37.886,9.961) R9.2@37.118,9.193 ; R8.2@36.482,10.857 cw(c35.714,10.089) 36.8,10.089 cw(c37.886,10.089) R8.2@37.118,10.857 ; R8.2@36.588,10.963 cw(c36.076,10.451) 36.8,10.451 cw(c37.524,10.451) R8.2@37.012,10.963 ; R9.2@36.623,9.052 ccw(c36.196,9.479) 36.8,9.479 ccw(c37.404,9.479) R9.2@36.977,9.052 ; R8.2@36.623,10.998 cw(c36.196,10.571) 36.8,10.571 cw(c37.404,10.571) R8.2@36.977,10.998 ; R9.2@36.8,8.875 v6(36.8,11.175)
  Bottom Layer w0.3: C38.2@33.975,14.8 34.85,14.8 ; C38.2@34.278,14.538 cw(c34.85,14.043) 34.85,14.8 ; C38.2@34.278,15.062 ccw(c34.85,15.557) 34.85,14.8 ; R7.2@36.372,15.488 ccw(c35.8,14.993) 35.8,15.75 ; R7.2@36.372,16.012 cw(c35.8,16.507) 35.8,15.75 ; R7.2@36.648,15.573 ccw(c36.221,15.146) 36.221,15.75 ccw(c36.221,16.354) R7.2@36.648,15.927 ; v6(36.825,15.75) 35.8,15.75 ; 34.85,14.8 35.8,15.75
  Bottom Layer w0.6: C8.2@18.65,18.1 18.675,18.125 20.775,18.125 20.8,18.1 v2(22.4,18.1) 22.425,18.125 v2(23.4,18.125) ; C8.2@18.977,18.502 ccw(c19.886,19.411) 19.886,18.125 ; C8.2@19.328,18.125 ccw(c19.328,19.497) L1.2@20.298,18.527 ; L1.2@21.252,18.527 ccw(c22.282,19.557) v2@22.282,18.1 ; 22.989,18.125 ccw(c22.989,19.411) C6.2@23.898,18.502 ; C6.2@23.837,18.401 cw(c23.425,18.532) v2@23.425,18.1 ; C6.2@23.844,18.421 cw(c23.4,18.606) v2(23.4,18.125) ; C6.2@24.552,18.502 ccw(c25.522,19.472) 25.522,18.1 ; v2@25.068,18.1 ccw(c25.068,19.557) C5.2@26.098,18.527 ; C5.2@26.752,18.527 ccw(c27.782,19.557) C4.2@27.782,18.1 ; C5.2@26.883,18.1 ccw(c26.883,19.642) C4.2@27.973,18.552 ; C4.2@28.627,18.552 ccw(c29.717,19.642) v2@29.717,18.1 ; v2@29.9,18.1 v2(26.425,18.1) v2@23.425,18.1 ; v2(29.9,18.125) 29.925,18.1 31.275,18.1 31.65,18.475 31.65,21.475 ; C3.2@31.128,21.097 cw(c32.039,20.186) 32.039,21.475 ; C2.2@31.175,22.872 cw(c30.066,21.74) v2@31.65,21.74 ; C7.2@31.18,25.096 cw(c30.563,24.232) v2@31.625,24.232 ; C3.2@31.198,20.373 cw(c30.108,19.283) 31.65,19.283 ; C2.2@31.236,23.572 ccw(c30.889,24.25) v2@31.65,24.25 ; C3.2@31.247,21.065 ccw(c30.823,21.775) v2(31.65,21.775) ; C7.2@31.325,25.45 31.625,25.15 v2(31.625,24.275) v2@31.65,24.25 ; C3.2@31.552,20.673 cw(c33.487,18.738) 33.487,21.475 ; v2@31.615,21.74 ccw(c32.254,22.379) 32.254,21.475 ; R7.2@36.648,15.927 ccw(c36.221,16.354) 36.825,16.354 ccw(c37.429,16.354) R7.2@37.002,15.927 ; v6(36.825,15.75) 36.825,18.95 34.3,21.475 31.65,21.475 ; v2(23.4,18.125) v2@23.425,18.1 ; 31.65,21.475 cw(c31.265,21.475) 31.332,21.096 ccw(c31.265,21.475) 31.65,21.475 ; 31.65,21.475 v2(31.65,21.775) ; v2(31.65,21.775) v2@31.65,24.25
pads on no net: P1.4 P1.MH1 P1.MH2 P2.3.25 P2.7 U1.6 U1.7 U1.8 U1.9 U1.13 U1.17 U1.18 U1.20 U1.23 U1.24 U1.25 U1.26 U1.31 U1.35 U1.36 U1.37 U1.42 U1.43 U1.45 U1.47

## Keep-outs
Keep-Out Layer:
  lines w0.254: -2.507,38.51 -2.005,40.036 ; -2.369,1.533 -1.855,0.011 ; -2.259,40.035 -1.751,40.037 ; -2.109,0.01 -1.601,0.012 ; -1.96,28.048 -2.005,40.036 ; -1.9,12 -1.855,0.011 ; -1.491,38.514 -2.005,40.036 ; -1.353,1.537 -1.855,0.011 ; 0.008,41.26 0.008,41.768 ; 1.532,41.006 0.008,41.514 ; 1.532,42.022 0.008,41.514 ; 21.721,41.514 0.008,41.514 ; 36.245,41.514 57.958,41.514 ; 56.434,41.006 57.958,41.514 ; 56.434,42.022 57.958,41.514 ; 57.958,41.26 57.958,41.768 ; 0,0 0,40.025 21.725,40.025 57.95,40.025 57.95,0 0,0
  text "57.95 (mm)" at 21.975,40.6 h1.52
  text "40.025 (mm)" at -2.873,27.79 h1.52 r270.21

## Other copper
Top Layer:
  text "-" at 21.625,37.95 h3
  text "-" at 39.65,36.975 h3
  text "+" at 12.85,34.875 h3
  text "1v8" at 23.05,31.575 h1.5 r90
  text "-" at 39.625,30.875 h3
  text "-" at 14.775,26.6 h3
  text "." at 31.025,18.35 h3
  text "Arash7" at 1.4,8 h8
  text "USB <-> ETH" at 8.15,3.85 h3
  text "V1.1" at 8.15,1.425 h3
Bottom Layer:
  rectangle net GND: 0.425,26.475 8.025,39.7
  rectangle net GND: 22.4,19.725 29.9,27.275
  text "Arash7" at 20.6,7.975 h8

## Text inside footprints (layer, text, board x,y; h text height)
C21: Top Overlay "+" at 14.35,32.6 h1.52 r90
P1: Mechanical 1 "PCB Edge" at -0.47,23.998 h0.25 r270
P3: Mechanical 1 "PCB Edge" at 59.55,24.012 h0.2 r90